# EAGLE board PCB_Mohamed_Hassan_BRD (EAGLE 9.6.2)
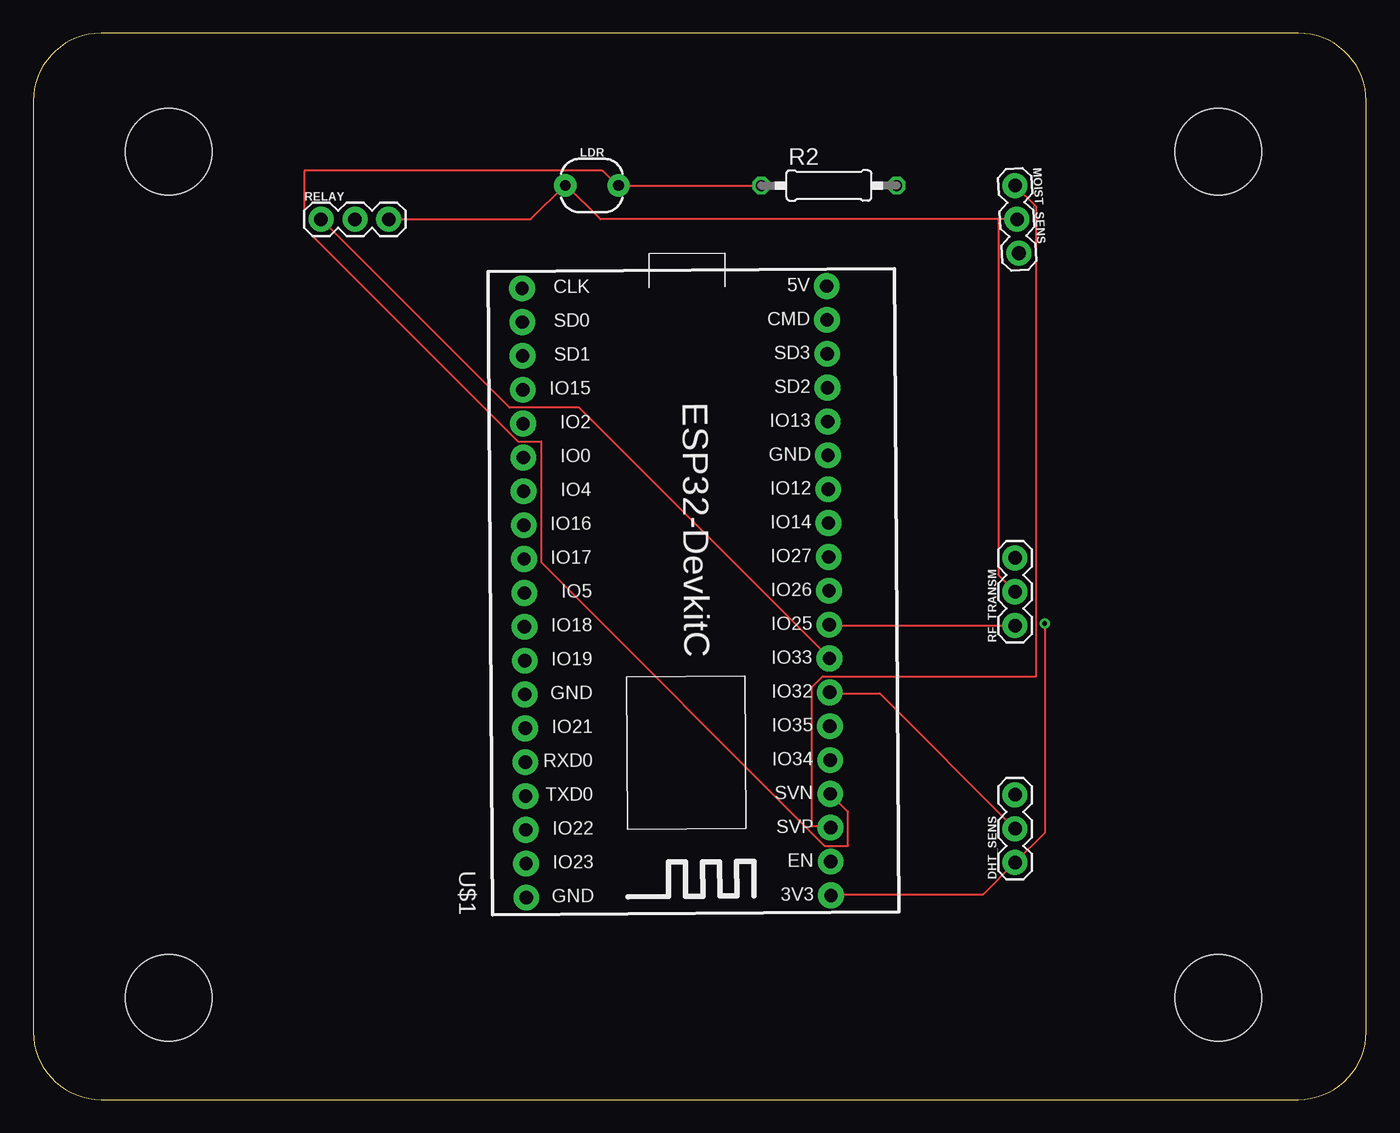
[diagram p0: board, top side]
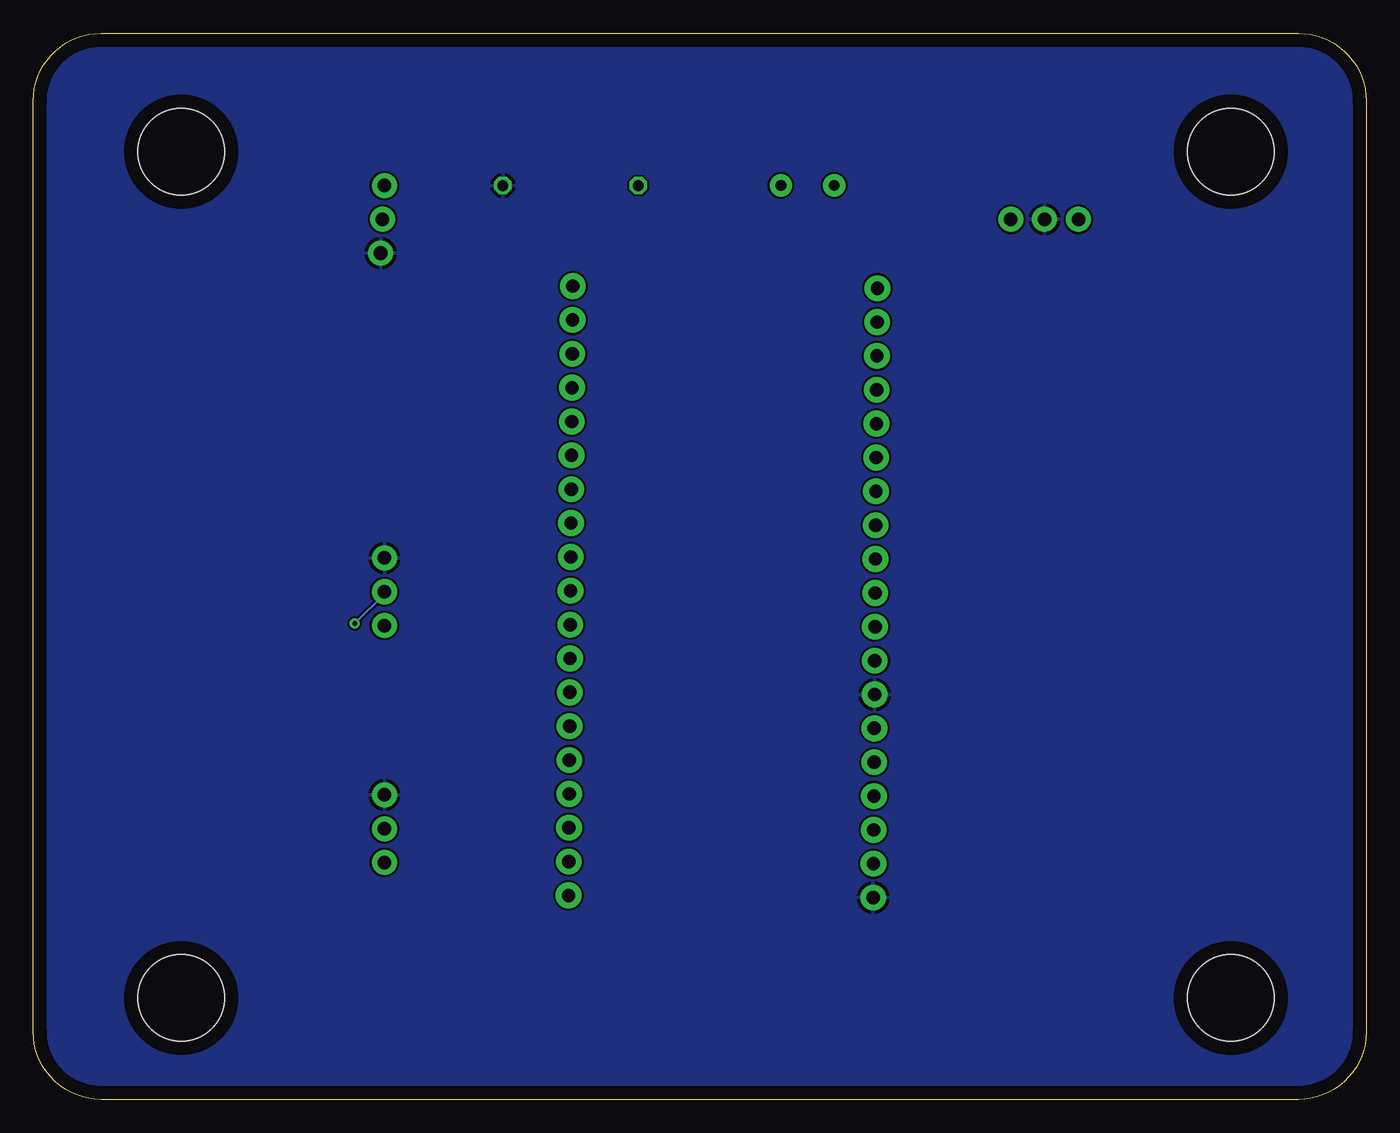
[diagram p1: board, bottom side, seen from below]

Size 100 x 80 mm. Coordinates in mm from the lower left corner, seen from the top.
Outline: 0,74.92 0,5.08 arc90 5.08,0 94.92,0 arc90 100,5.08 100,74.92 arc90 94.92,80 5.08,80 arc90 0,74.92
Copper layers (1*16): Top 0.035mm / dielectric 1.5mm / Bottom 0.035mm
Design rules "default": minimum track width 6mil, minimum drill 0.35mm, track to track 6mil, track to pad 6mil, pad to pad 6mil, via to via 6mil, smd to smd 6mil, copper to edge 40mil, drill to drill 6mil, minimum pad ring 10mil, minimum via ring 8mil, stop-mask expansion 4mil, vias tented up to drill 0mil, thermal gap 10mil
Holes 6.5 mm at 10.16,7.62 10.16,71.12 88.9,71.12 88.9,7.62

## Footprints (pad centres in the part's own frame; a part is rotated, then mirrored left to right if it is on the bottom)
1X03 = drill 1.016 pad 1.88: 1 0,0; 2 2.54,0; 3 5.08,0
PHOTOCELL = drill 0.8 pad 1.676: 1 -2,0; 2 2,0
0207/10 = drill 0.813 octagon: 1 -5.08,0; 2 5.08,0
ESP32-DEVKITC = drill 1 pad 1.93: 1 -22.86,-10.16; 2 -20.32,-10.16; 3 -17.78,-10.16; 4 -15.24,-10.16; 5 -12.7,-10.16; 6 -10.16,-10.16; 7 -7.62,-10.16; 8 -5.08,-10.16; 9 -2.54,-10.16; 10 0,-10.16; 11 2.54,-10.16; 12 5.08,-10.16; 13 7.62,-10.16; 14 10.16,-10.16; 15 12.7,-10.16; 16 15.24,-10.16; 17 17.78,-10.16; 18 20.32,-10.16; 19 22.86,-10.16; 20 22.86,12.7; 21 20.32,12.7; 22 17.78,12.7; 23 15.24,12.7; 24 12.7,12.7; 25 10.16,12.7; 26 7.62,12.7; 27 5.08,12.7; 28 2.54,12.7; 29 0,12.7; 30 -2.54,12.7; 31 -5.08,12.7; 32 -7.62,12.7; 33 -10.16,12.7; 34 -12.7,12.7; 35 -15.24,12.7; 36 -17.78,12.7; 37 -20.32,12.7; 38 -22.86,12.7

## Placement (x,y rotation side)
DHT_SENS  455-1750-1-ND  [1X03]  73.66,17.78 90 top
LDR  PHOTOCELLPTH  [PHOTOCELL]  41.91,68.58 0 top
MOIST_SENS  455-1750-1-ND  [1X03]  73.66,68.58 273.2 top
R2  [0207/10]  59.69,68.58 0 top
RELAY  455-1750-1-ND  [1X03]  21.59,66.04 0 top
RF_TRANSM  455-1750-1-ND  [1X03]  73.66,35.56 90 top
U$1  ESP32DEVKITC  [ESP32-DEVKITC]  49.53,38.1 90.4 top

## Library data of the parts
DHT_SENS MOIST_SENS RELAY RF_TRANSM = SparkFun-Connectors; PROD_ID: XXX-00000
LDR = SparkFun-Sensors; PROD_ID: COMP-09129; SF_ID: SEN-09088
R2 = rcl; SPICEPREFIX: R
U$1 = ESP32-DEVKITC_1000mil

## Nets
3.3V: DHT_SENS.1 LDR.1 MOIST_SENS.2 RELAY.3 RF_TRANSM.2 U$1.1
GND: DHT_SENS.3 MOIST_SENS.3 R2.2 RELAY.2 RF_TRANSM.3 U$1.32 U$1.38
N$1: LDR.2 R2.1 U$1.4
N$4: DHT_SENS.2 U$1.7
N$5: RELAY.1 U$1.8
N$6: MOIST_SENS.1 U$1.3
N$7: RF_TRANSM.1 U$1.9

## Tracks (layer width: path | path; a pad name or v marks a point on that pad's centre or on a via)
3.3V  (via drill 0.35)
  Top 0.152: U$1.1 60.01,15.4 71.28,15.4 DHT_SENS.1 75.88,20 v75.88,35.72 | RELAY.3 37.31,66.04 39.85,68.58 LDR.1 40.01,68.58 42.55,66.04 72.39,66.04 | RF_TRANSM.2 72.39,39.37 72.39,66.04 | 72.39,66.04 73.66,66.04 MOIST_SENS.2
  Bottom 0.152: v75.88,35.72 73.66,37.94 RF_TRANSM.2
GND
  pour Bottom: -7.62,81.28 -7.62,-0.44 arc45 -6.13,-4.03 0,-10.16 99.5,-10.16 arc45 103.09,-8.67 114.3,2.54 114.3,66.48 arc45 112.81,70.07 96.52,86.36 -0.44,86.36 arc45 -4.03,84.87
N$1
  Top 0.152: R2.1 LDR.2 43.81,68.58 42.7,69.69 20.32,69.69 20.32,65.41 36.35,49.37 38.1,49.37 38.1,40.32 59.37,19.05 61.12,19.05 61.12,21.59 59.85,22.86 U$1.4
N$4
  Top 0.152: DHT_SENS.2 63.5,30.48 59.85,30.48 U$1.7
N$5
  Top 0.152: RELAY.1 35.72,51.91 40.96,51.91 59.69,33.18 U$1.8
N$6
  Top 0.152: MOIST_SENS.1 75.25,66.99 75.25,31.75 59.21,31.75 58.42,30.96 58.42,20.48 59.69,20.48 U$1.3
N$7
  Top 0.152: RF_TRANSM.1 59.85,35.56 U$1.9